# Altium PCB receiver.PcbDoc
Units mil, origin at the board's own origin, x right, y up, seen from the top; angles counter-clockwise.
Board outline 1968.5 x 3897.64 mil, 2 copper layers (Top Layer, Bottom Layer); 43 components, 17 nets, 113 pads, 22 vias.
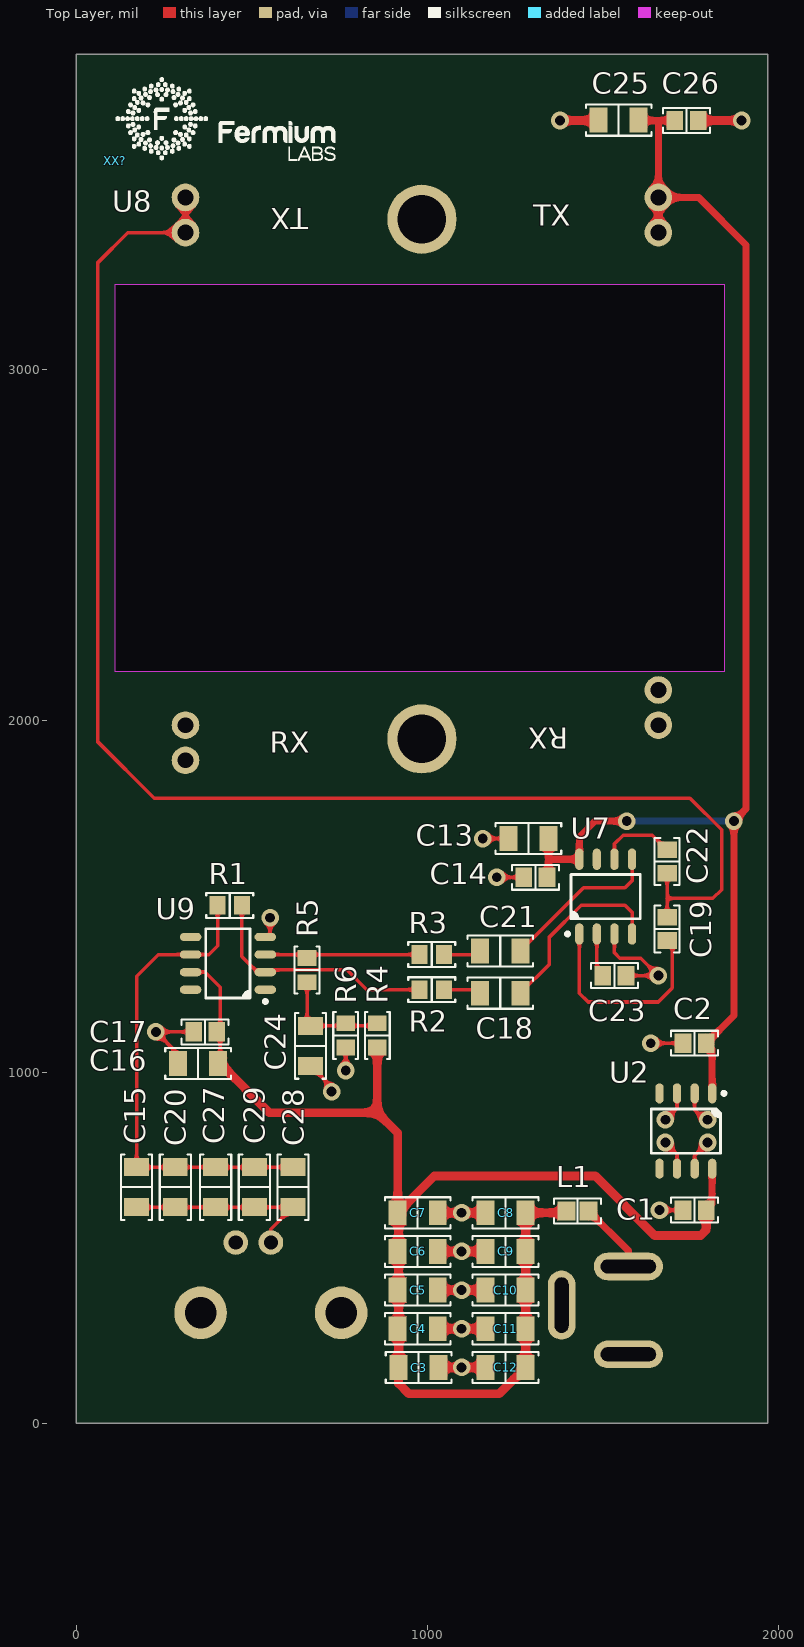
[diagram p0: Top Layer view]
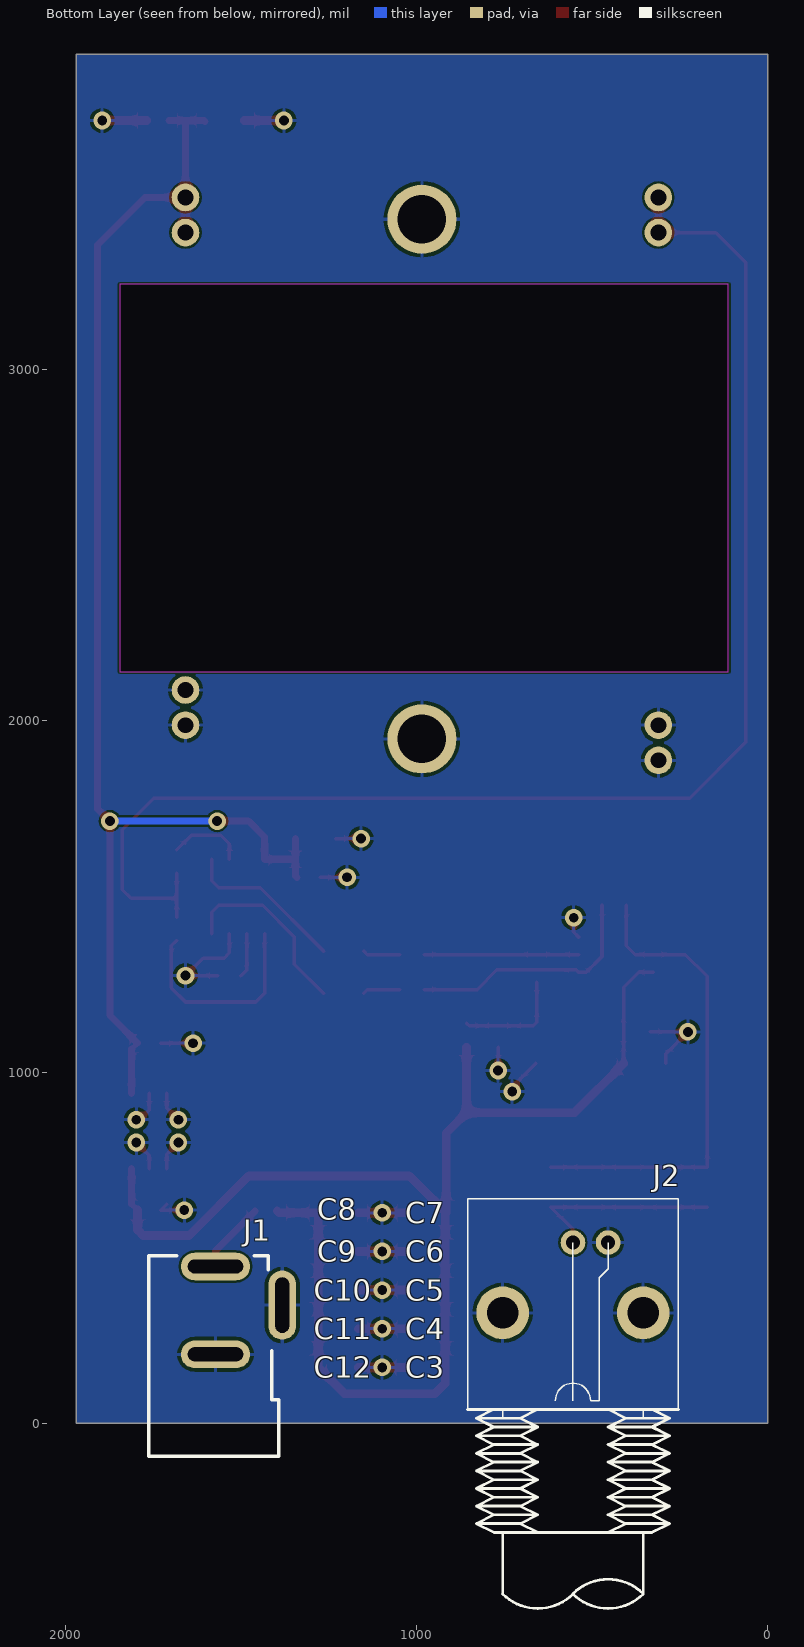
[diagram p1: Bottom Layer view, seen from below]
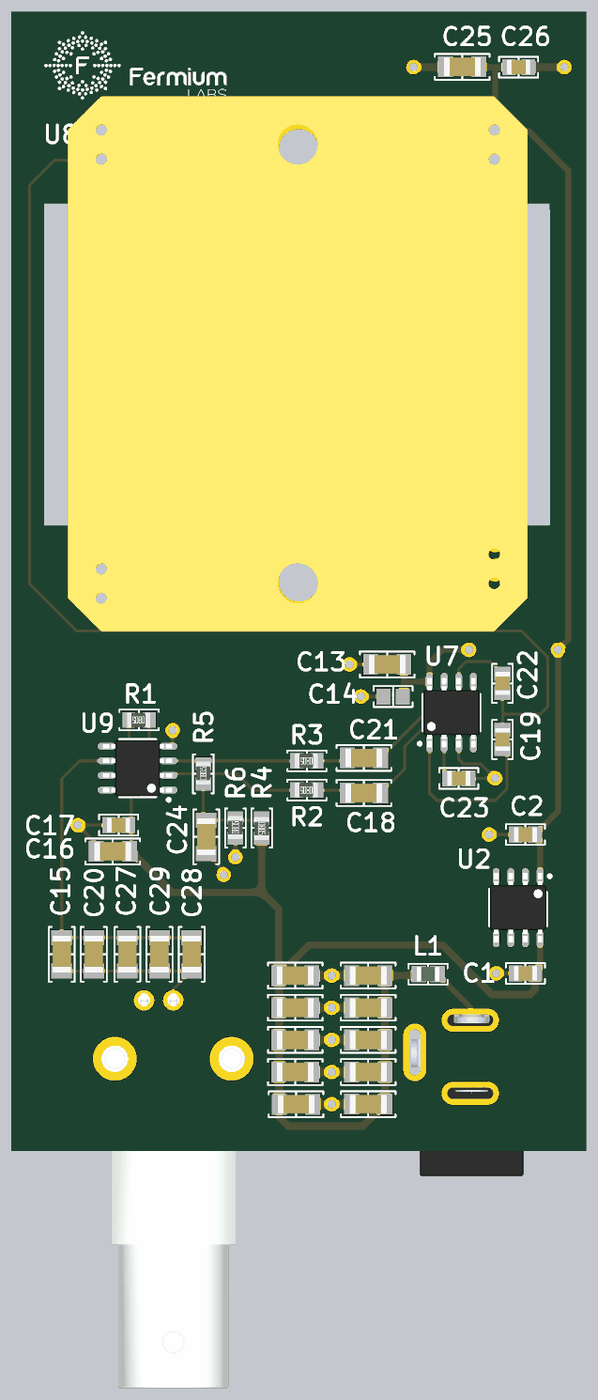
[diagram p2: 3D render of the assembled board from above, using the file's embedded part models]

## Layer stack, top to bottom
Top Solder: solder mask 0.4, Solder Resist, Dk 3.5
Top Layer: signal copper 1.4
Dielectric 1: dielectric 12.6, FR-4, Dk 4.8
Bottom Layer: signal copper 1.4
Bottom Solder: solder mask 0.4, Solder Resist, Dk 3.5

## Board outline
0,0 1968.5,0 1968.5,3897.64 0,3897.64

## Design rules (kind name [scope] priority, off if disabled: settings)
Clearance [All] p1: gap=6 ignorepadtopadclearanceinfootprint=FALSE
FanoutControl Fanout_LCC [All] p1 off: bgadir=Out bgaviamode=Centered fanoutstyle=Auto fanoutdirection=Alternating viagrid=1 // Protel DXP Scope 1 Expression Was: IsLCC   Fanout_LCC (Default Rule)
FanoutControl Fanout_BGA [All] p2 off: bgadir=Out bgaviamode=Centered fanoutstyle=Auto fanoutdirection=Alternating viagrid=1 // Protel DXP Scope 1 Expression Was: IsBGA   Fanout_BGA (Default Rule)
FanoutControl Fanout_SOIC [All] p3 off: bgadir=Out bgaviamode=Centered fanoutstyle=Auto fanoutdirection=Alternating viagrid=1 // Protel DXP Scope 1 Expression Was: IsSOIC   Fanout_SOIC (Default Rule)
FanoutControl Fanout_Default [All] p4: bgadir=Out bgaviamode=Centered fanoutstyle=Auto fanoutdirection=Alternating viagrid=1 // Fanout_Default (Default Rule)
FanoutControl Fanout_Small [All] p5 off: bgadir=Out bgaviamode=Centered fanoutstyle=Auto fanoutdirection=Alternating viagrid=1 // Protel DXP Scope 1 Expression Was: (CompPinCount < 5)   Fanout_Small (Default Rule)
HoleSize [All] p1: absolutevalues=TRUE maxlimit=99999 minlimit=11.81 maxpercent=80.000 minpercent=20.000
MinimumSolderMaskSliver [All] p1 off: minsoldermaskwidth=7.87
PolygonConnect [All] p1: connectstyle=Relief reliefconductorwidth=10 reliefentries=4 polygonreliefangle="90 Angle" airgapwidth=10
RoutingVias [All] p1: holewidth=28 width=50 viastyle="Through Hole" minholewidth=28 minwidth=50 maxholewidth=28 maxwidth=50
SilkToSilkClearance [All] p1: silktosilkclearance=7.87
SilkToSolderMaskClearance [All] p1 off: minsilkscreentomaskgap=10 clearancetoexposedcopper=TRUE // Protel DXP Scope 1 Expression Was: IsPad
SolderMaskExpansion [All] p1: expansion=2
Width [All] p1: maxlimit=200 minlimit=6 preferedwidth=10
21 further rules are at their usual default settings.

## Components (designator, comment, footprint, x,y, rotation, side; value= is the part's Value field where it differs from the comment)
C1 "" "CAP 0805/2012" 1760.51,607.32 r180 top
C2 "" "CAP 0805/2012" 1760.51,1082.32 r180 top
C3 "" "CAP 1206/3216" 974.88,159.09 r0 top
C4 "" "CAP 1206/3216" 972.24,269.65 r0 top
C5 "" "CAP 1206/3216" 972.24,379.65 r0 top
C6 "" "CAP 1206/3216" 972.24,489.65 r0 top
C7 "" "CAP 1206/3216" 972.24,599.65 r0 top
C8 "" "CAP 1206/3216" 1222.24,599.65 r180 top
C9 "" "CAP 1206/3216" 1222.24,489.65 r180 top
C10 "" "CAP 1206/3216" 1222.24,379.65 r180 top
C11 "" "CAP 1206/3216" 1222.24,269.65 r180 top
C12 "" "CAP 1206/3216" 1222.24,159.65 r180 top
C13 "" "CAP 1206/3216" 1287.24,1664.65 r180 top
C14 "" "CAP 0805/2012" 1307.24,1554.65 r180 top
C15 "" "CAP 1206/3216" 172.24,672.56 r270 top
C16 "" "CAP 1206/3216" 347.24,1024.65 r180 top
C17 "" "CAP 0805/2012" 367.24,1114.65 r180 top
C18 "" "CAP 1206/3216" 1207.24,1224.65 r180 top
C19 "" "CAP 0805/2012" 1682.24,1407.65 r270 top value=1nF
C20 "" "CAP 1206/3216" 282.24,672.56 r270 top
C21 "" "CAP 1206/3216" 1207.24,1344.65 r180 top
C22 "" "CAP 0805/2012" 1682.24,1599.65 r90 top value=1nF
C23 "" "CAP 0805/2012" 1532.24,1274.65 r0 top
C24 "" "CAP 1206/3216" 667.24,1074.65 r270 top
C25 "" "CAP 1206/3216" 1544.24,3709.65 r180 top
C26 "" "CAP 0805/2012" 1737.24,3708.65 r0 top
C27 "" "CAP 1206/3216" 397.24,672.56 r270 top
C28 "" "CAP 1206/3216" 617.24,672.56 r270 top
C29 "" "CAP 1206/3216" 507.24,672.56 r270 top
J1 "" dc-jack 1571.8,446.85 r270 bottom
J2 "" BNC-RA 754.33,314.96 r0 bottom
L1 "Inductor Iron" "FER 0805/2012" 1427.24,604.65 r180 top
R1 "Res1" "RES 0805/2012" 437.24,1474.65 r180 top value=220K
R2 "Res1" "RES 0805/2012" 1012.24,1234.65 r180 top value=10K
R3 "Res1" "RES 0805/2012" 1012.24,1334.65 r180 top value=10K
R4 "Res1" "RES 0805/2012" 857.24,1104.65 r270 top value=1K
R5 "Res1" "RES 0805/2012" 657.24,1290.2 r90 top value=220K
R6 "Res1" "RES 0805/2012" 767.24,1104.65 r90 top value=1K
U2 "L78L05ACD" "ST SOIC-8N" 1735.51,832.32 r270 top
U7 "SA612A" "TI SOIC-8 D" 1507.24,1499.65 r90 top
U8 "HB100" HB100-buried 311.24,3489.65 r270 top
U9 "" "TI SOIC-8 D" 432.24,1309.65 r180 top
XX? "fermiumlabs-logo" frm-med 111.81,3594.65 r0 top

## Footprints (in the part's own frame and the unit in brackets; to place one, negate y for a bottom-side part, rotate by r counter-clockwise, add the part's x,y. Pads: shape width x height; smd on the part's side, far side on the other; paste and mask are expansions set on the pad)
BNC-RA [mil]
  round 70 hole 40: 1(-200,-200) 2(-300,-200)
  round 150 hole 90: A(0,0) B(-400,0)
  silkscreen extent -500,-325 100,842, body extent -490,-280 91,1127, height 619
"CAP 0805/2012" [mm] "Chip Capacitor, 2-Leads, Body 2.00x1.20mm, IPC Medium Density"
  rect 1.2x1.4 smd: 1(-0.838,0) 2(0.838,0)
  silkscreen extent -1.7,-0.9 1.7,0.9, body extent -1,-0.64 1,0.64, height 1.26
"CAP 1206/3216" [mm] "Chip Capacitor, 2-Leads, Body 3.25x1.60mm, IPC Medium Density"
  rect 1.3x1.8 smd: 1(-1.45,0) 2(1.45,0)
  silkscreen extent -2.37,-1.12 2.37,1.12, body extent -1.6,-0.81 1.6,0.81, height 1.62
dc-jack [mm]
  oval 2x5 hole 1 slot 4 at 90 deg: 1(0,0) 3(6.35,0)
  oval 5x2 hole 1 slot 4 at 0 deg: 2(2.794,4.826)
  silkscreen extent -0.76,-4.83 13.72,4.57, body extent -0.76,-4.62 13.54,5.13, height 11.3
"FER 0805/2012" [mm] "Chip Ferrite, 2-Leads, Body 2.00x1.20mm, IPC Medium Density"
  rect 1.3x1.4 smd: 1(-0.8,0) 2(0.8,0)
  silkscreen extent -1.7,-0.9 1.7,0.9, body extent -1,-0.64 1,0.64, height 1.26
frm-med [mil]
  silkscreen extent 1,1 626,237
HB100-buried [mm]
  round 2 hole 1.143: 1(0,34.188) 1(2.54,34.188) 2(0,0) 2(2.54,0) 3(38.151,0) 3(40.691,0) 4(35.611,34.188) 4(38.151,34.188)
  round 5 hole 3.5: 5(1.575,17.094) 5(39.141,17.094)
  Keep-Out Layer board cut-out: 34.286,38.934 34.286,-5.066 6.286,-5.066 6.286,38.934
  body extent -3.02,-3 43.48,37, height 3
"RES 0805/2012" [mm] "Chip Resistor, 2-Leads, Body 2.00x1.25mm, IPC Medium Density"
  rect 1.15x1.35 smd: 1(-0.875,0) 2(0.875,0)
  silkscreen extent -1.7,-0.9 1.7,0.9, body extent -0.95,-0.62 1.05,0.63, height 0.6
"ST SOIC-8N" [mm] "SOIC, 8-Leads, Body 4.90x3.90mm, Pitch 1.27mm, IPC Medium Density"
  oval 1.45x0.6 smd: 1(-2.725,1.905) 2(-2.725,0.635) 3(-2.725,-0.635) 4(-2.725,-1.905) 5(2.725,-1.905) 6(2.725,-0.635) 7(2.725,0.635) 8(2.725,1.905)
  silkscreen extent -2.85,-2.5 1.6,2.88, body extent -3.01,-2.45 3.01,2.45, height 1.5
"TI SOIC-8 D" [mm] "SOP, 8-Leads, Body 4.90x3.90mm, Pitch 1.27mm, IPC Medium Density"
  oval 1.55x0.6 smd: 1(-2.7,1.905) 2(-2.7,0.635) 3(-2.7,-0.635) 4(-2.7,-1.905) 5(2.7,-1.905) 6(2.7,-0.635) 7(2.7,0.635) 8(2.7,1.905)
  silkscreen extent -2.82,-2.5 1.6,2.88, body extent -3.01,-2.45 3.01,2.45, height 1.5

## Part data
C1 C2 C14 C17 C23 C26: library part Cap2, "Capacitor", Capacitance=100nF, Capacitor kind=MLCC, Capacitor type=ceramic, Case - inch=0805, Case - mm=2012, Dielectric=X7R, Manufacturer=YAGEO, Manufacturer Part Number=CC0805JRX7R9BB104, Operating voltage=50V, Supplier Part Number 1=CC0805JRX7R9104, Tolerance=±5%, Category="0805 MLCC SMD Capacitors", ComponentLink1Description=http://static.tme.eu/products_pics/d/b/b/dbbd93eaf25225110ca26eb66da77328/58538.jpg, ComponentLink1URL=http://static.tme.eu/products_pics/d/b/b/dbbd93eaf25225110ca26eb66da77328/58538.jpg, MinAmount=100, Mounting=SMD, Multiples=100, Pads="2 SMD", Price Type=NET, Pricing 1="100=0.00613, 300=0.00464, 1000=0.00342, 4000=0.00284, 20000=0.00273 (EUR)", Stock 1=89911, SuppliedAmount=0, Supplier 1=TME, Unit=pcs, Weight=0.042
C3 C4 C5 C6 C7 C8 C9 C10 C11 C12 C13 C15 C16 C18 C20 C21 C24 C25 C27 C28 C29: library part Cap2, "Capacitor", Capacitance=10µF, Capacitor kind=MLCC, Capacitor type=ceramic, Case - inch=1206, Case - mm=3216, Dielectric=X5R, Manufacturer=SAMSUNG, Manufacturer Part Number=CL31A106KAHNNNE, Operating temperature=-55...85°C, Operating voltage=25V, Tolerance=±10%, Category="1206 MLCC SMD Capacitors", ComponentLink1Description=http://static.tme.eu/products_pics/b/e/9/be9e0dd298dcf4979ea1dd3d226e0bfa/58780.jpg, ComponentLink1URL=http://static.tme.eu/products_pics/b/e/9/be9e0dd298dcf4979ea1dd3d226e0bfa/58780.jpg, MinAmount=100, Mounting=SMD, Multiples=100, PackageDescription=1206, PackageReference=CAPR5-4X5, Pads="2 SMD", Price Type=NET, Pricing 1="100=0.0248, 300=0.0203, 1000=0.0167, 2000=0.0131, 10000=0.0127 (EUR)", Published=23-Sep-2002, Publisher="Altium Limited", Stock 1=279700, SuppliedAmount=0, Supplier 1=TME, Supplier Part Number 1=CL31A106KAHNNNE, Unit=pcs, Weight=0.061
C19 C22: library part Cap, "Capacitor", Capacitance=1nF, Case/Package=0805, Case Code (Metric)=2012, Dielectric=X7R, Manufacturer=Samsung, Manufacturer Part Number=CL21B102KCANNNC, Max Operating Temperature=125°C, Min Operating Temperature=-55°C, Package Quantity=1, Tolerance=10%, Voltage=100V, Case Code (Imperial)=0805, ComponentLink1Description=https://datasheet.ciiva.com/26878/getdatasheetpartid-643098-26878049.pdf, ComponentLink1URL=https://datasheet.ciiva.com/26878/getdatasheetpartid-643098-26878049.pdf, ComponentLink2Description=https://datasheet.ciiva.com/29199/456063-da-01-en-vs-kondensator-0805-29199067.pdf, ComponentLink2URL=https://datasheet.ciiva.com/29199/456063-da-01-en-vs-kondensator-0805-29199067.pdf, ComponentLink3Description=https://datasheet.ciiva.com/26310/mlcc-catalogdownload2013-eng-26310183.pdf, ComponentLink3URL=https://datasheet.ciiva.com/26310/mlcc-catalogdownload2013-eng-26310183.pdf, Depth=1.25mm, Height=0.65mm, Lead Free="Lead Free", Length=2mm, Material=Ceramic, Mount="Surface Mount", Packaging="Tape and Reel", Pricing 1="100=0.0073, 300=0.0056, 1000=0.0044, 4000=0.0032, 20000=0.0031 (USD)", Radiation Hardening=No, Stock 1=40500, Supplier 1=TME, Supplier Part Number 1=CL21B102KCANNNC, Thickness=0.03inch, Voltage Rating=100V, Voltage Rating (DC)=100V, Width=0.049inch
J1: library part jackdc, Manufacturer=CLIFF, Manufacturer Part Number="DC-10A FC68148", Package type="in bulk", Rated current=5A, Rated voltage="12V DC", Supplier Part Number 1=FC68148, Category="DC power connectors", ComponentLink1Description=http://static.tme.eu/products_pics/f/8/e/f8eb2e1bea4ffe6692f5958f8ef9edd4/323250.jpg, ComponentLink1URL=http://static.tme.eu/products_pics/f/8/e/f8eb2e1bea4ffe6692f5958f8ef9edd4/323250.jpg, Connector=socket, Connector type="DC supply", Connector variant="with on/off switch", Contact size=5,5/2,1mm, Electrical mounting=soldering, MinAmount=1, Multiples=1, Pads="3 THT", Plug inside diameter=2.1mm, Plug outside diameter=5.5mm, Price Type=NET, Pricing 1="1=0.4194, 20=0.3065, 100=0.2581, 500=0.2258 (USD)", Spatial orientation="angled 90°", Stock 1=20287, SuppliedAmount=0, Supplier 1=TME, Unit=pcs, Weight=1.733
J2: library part BNC-PCB-RA, "connector bnc", Manufacturer="TE CONNECTIVITY", Manufacturer Part Number=1-1337543-0, Category="BNC connectors", ComponentLink1Description=http://static.tme.eu/products_pics/6/3/2/63240353f8a8790dbe8f7bd93b014c1a/378606.jpg, ComponentLink1URL=http://static.tme.eu/products_pics/6/3/2/63240353f8a8790dbe8f7bd93b014c1a/378606.jpg, Connector=socket, Connector type=BNC, Connector variant=insulated, Contact plating="gold plated", Electrical mounting=THT, Insulator material=polyester, Mechanical mounting="on PCBs", MinAmount=1, Multiples=1, Pads="4 THT", Price Type=NET, Pricing 1="1=1.22, 25=1.1, 100=0.98, 1000=0.86 (EUR)", Spatial orientation="angled 90°", Stock 1=44, SuppliedAmount=0, Supplier 1=TME, Supplier Part Number 1=1-1337543-0, Unit=pcs, Wave impedance=50O, Weight=13.22
L1: "Magnetic-Core Inductor", Case/Package=0805, Case Code (Metric)=2012, Current Rating=500mA, DC Current=200mA, DC Resistance (DCR)=280mR, Frequency=100MHz, Manufacturer=Murata, Manufacturer Part Number=BLM21AG102SN1D, Max Current Rating=600mA, Max Operating Temperature=125°C, Min Operating Temperature=-55°C, Package Quantity=1, Tolerance=25%, Case Code (Imperial)=0805, ComponentLink1Description=https://datasheet.ciiva.com/19454/1845136-19454717.pdf, ComponentLink1URL=https://datasheet.ciiva.com/19454/1845136-19454717.pdf, ComponentLink2Description=https://datasheet.ciiva.com/18093/getdatasheetpartid-139643-18093010.pdf, ComponentLink2URL=https://datasheet.ciiva.com/18093/getdatasheetpartid-139643-18093010.pdf, ComponentLink3Description=https://datasheet.ciiva.com/29347/442432-da-01-en-chip-drossel-0805-1000r-200ma-2-0x1-25mm-29347996.pdf, ComponentLink3URL=https://datasheet.ciiva.com/29347/442432-da-01-en-chip-drossel-0805-1000r-200ma-2-0x1-25mm-29347996.pdf, ComponentLink4Description=https://datasheet.ciiva.com/41449/001172322-da-01-en-drossel-0805-1000r-2-0x1-25mm-4000st-41449636.pdf, ComponentLink4URL=https://datasheet.ciiva.com/41449/001172322-da-01-en-drossel-0805-1000r-2-0x1-25mm-4000st-41449636.pdf, ComponentLink5Description=https://datasheet.ciiva.com/6212/l0110s0100blm21a-6212318.pdf, ComponentLink5URL=https://datasheet.ciiva.com/6212/l0110s0100blm21a-6212318.pdf, ComponentLink6Description=https://datasheet.ciiva.com/16286/l0110s0100blm21a-16286461.pdf, ComponentLink6URL=https://datasheet.ciiva.com/16286/l0110s0100blm21a-16286461.pdf, ComponentLink7Description=https://datasheet.ciiva.com/8021/l0110s0100blm21a-8021550.pdf, ComponentLink7URL=https://datasheet.ciiva.com/8021/l0110s0100blm21a-8021550.pdf, ComponentLink8Description=https://datasheet.ciiva.com/8021/l0110s0100blm21a-8021548.pdf, ComponentLink8URL=https://datasheet.ciiva.com/8021/l0110s0100blm21a-8021548.pdf, ComponentLink9Description=https://datasheet.ciiva.com/3081/l0110s0100blm21a-3081640.pdf, ComponentLink9URL=https://datasheet.ciiva.com/3081/l0110s0100blm21a-3081640.pdf, ComponentLink10Description=https://datasheet.ciiva.com/25903/l0110s0100blm21a-25903493.pdf, ComponentLink10URL=https://datasheet.ciiva.com/25903/l0110s0100blm21a-25903493.pdf, ComponentLink11Description=https://datasheet.ciiva.com/3082/l0110s0100blm21a-3082728.pdf, ComponentLink11URL=https://datasheet.ciiva.com/3082/l0110s0100blm21a-3082728.pdf, ComponentLink12Description=https://datasheet.ciiva.com/6212/l0110s0100blm21a-6212347.pdf, ComponentLink12URL=https://datasheet.ciiva.com/6212/l0110s0100blm21a-6212347.pdf, ComponentLink13Description=https://datasheet.ciiva.com/6212/l0110s0100blm21a-6212345.pdf, ComponentLink13URL=https://datasheet.ciiva.com/6212/l0110s0100blm21a-6212345.pdf, Core Material=Ferrite, Depth=1.25mm, Height=0.85mm, Impedance=1KR, Lead Free="Lead Free", Length=2mm, Material=Steel,Ferrite, Max DC Current=200mA, Military Standard=Not, Number of Circuits=1, Number of Lines=1, Number of Pins=2, Packaging="Tape and Reel", Pricing 1="25=0.068, 100=0.0551, 1000=0.0451, 4000=0.0397 (USD)", Radiation Hardening=No, REACH SVHC="No SVHC", Shielding=Unshielded, Stock 1=53975, Supplier 1=TME, Supplier Part Number 1=BLM21AG102SN1D, Termination=SMD/SMT, Test Frequency=100MHz, Weight=0.000194oz, Width=1.25mm
R1 R5: "Resistor", Manufacturer="Royal Electronic Factory", Manufacturer Part Number=0805S8J0224T5E, Supplier Part Number 1=SMD0805-220K, Pricing 1="100=0.0065, 1000=0.0025, 5000=0.0009, 15000=0.0008, 50000=0.0008 (USD)", Stock 1=102100, Supplier 1=TME
R2 R3: "Resistor", Manufacturer="Royal Electronic Factory", Manufacturer Part Number=0805S8J0103T5E, Supplier Part Number 1=SMD0805-10K, Pricing 1="100=0.0065, 1000=0.0023, 5000=0.0008, 15000=0.0008, 50000=0.0008 (USD)", Stock 1=1600500, Supplier 1=TME
R4 R6: "Resistor", Manufacturer="Royal Electronic Factory", Manufacturer Part Number=0805S8J0102T5E, Supplier Part Number 1=SMD0805-1K, Pricing 1="100=0.0062, 1000=0.0024, 5000=0.0008, 15000=0.0008, 50000=0.0008 (USD)", Stock 1=2713700, Supplier 1=TME
U7: Supplier Part Number 1=SA612AD, Supplier 1=TME, Supplier 2=Mouser, Supplier Part Number 2=771-SA612AD01112
U8: Manufacturer="China unspecified", Manufacturer Part Number=HB100, Supplier 1=Alibaba, Supplier Part Number 1=HB100
U9: library part LF358, Supplier Part Number 1=LF356M/NOPB, Supplier 1=TME, Supplier 2=Mouser, Supplier 3=Farnell, Supplier Part Number 2=926-LF356M, Supplier Part Number 3=9486992
U2: Supplier 1=TME, Supplier Part Number 1=L78L05ACD

## Via types
v1: diameter 50, hole 28, Top Layer to Bottom Layer, 22 vias

## Nets (pads, with @x,y where several pads share a name; then routed paths per layer and width w, separated by ;. In a path a pad name is that pad's centre, name@x,y a point inside that pad or via, vN(x,y) a via of type N, cw(c..) or ccw(c..) an arc to the next point about the centre after c; other vN are vias at no path point)
5V: C2.1 C13.1 C14.1 C25.1 C26.1 U2.1 U7.8 U8.1 | length 3913.9
  Top Layer w10: C2.1 C2.1@1810.51,1065.32
  Top Layer w20: C14.1 1344.33,1558.73 1344.33,1604.65 ; C13.1 1344.33,1604.65 ; v1(1567.24,1714.65) 1477.24,1714.65 1432.24,1669.65 U7.8 1345.63,1605.94 1344.33,1604.65 ; C25.1@1601.25,3705.57 1604.33,3708.65 C26.1 ; U8.1@1657.24,3389.65 U8.1@1657.24,3489.65 ; 1657.24,3701.65 U8.1@1657.24,3489.65 ; C2.1 1872.24,1161.06 v1(1872.24,1714.65) 1907.24,1749.65 1907.24,3354.65 1772.24,3489.65 U8.1@1657.24,3489.65 ; U2.1 C2.1@1810.51,1065.32
  Bottom Layer w20: v1(1567.24,1714.65) v1(1872.24,1714.65)
12V: C1.1 C3.1 C4.1 C5.1 C6.1 C7.1 C8.1 C9.1 C10.1 C11.1 C12.1 C16.1 C17.1 L1.2 R4.2 U2.8 U9.7 | length 3948.8
  Top Layer w10: U9.7 367.24,1284.65 410.16,1241.73 C16.1@410.16,1024.65 ; C1.1 C1.1@1810.51,624.32
  Top Layer w20: C1.1@1810.51,624.32 U2.8
  Top Layer w25: C16.1@410.16,1024.65 550.16,884.65 857.24,884.65 ; R4.2 857.24,884.65 ; L1.2 1390.75,599.65 C8.1 C9.1 C10.1 C11.1 C12.1 1204.33,84.65 947.24,84.65 917.8,114.09 C3.1 917.8,379.65 917.8,597.01 C7.1 ; C1.1 1793.51,550.91 1777.24,534.65 1647.24,534.65 1477.24,704.65 1020.16,704.65 C7.1 ; 857.24,884.65 915.16,826.73 C7.1
GND: C1.2 C2.2 C3.2 C4.2 C5.2 C6.2 C7.2 C8.2 C9.2 C10.2 C11.2 C12.2 C13.2 C14.2 C16.2 C17.2 C23.2 C24.2 C25.2 C26.2 J1.2 J1.3 J2.2 J2.A J2.B R6.1 U2.2 U2.3 U2.6 U2.7 U7.3 U8.3 U8.4 U8.5 U9.4 | length 2346.4
  Top Layer w10: C16.2 290.16,1051.73 v1(227.24,1114.65) C17.2 ; U9.4 552.24,1398.35 v1(552.24,1439.65) ; C24.2@660.16,1024.65 C24.2 727.24,957.56 v1(727.24,944.65) ; v1(767.24,1004.65) R6.1 ; v1(1157.24,1664.65) C13.2 ; v1(1197.24,1554.65) C14.2 ; U7.3 1532.24,1339.65 1547.24,1324.65 1607.24,1324.65 v1(1657.24,1274.65) ; C23.2 v1@1632.24,1274.65 ; v1(1635.51,1082.32) C2.2 ; v1(1660.51,607.32) C1.2 C1.2@1710.51,624.32 ; v1(1677.24,799.65) 1710.51,766.38 U2.6 ; v1(1677.24,864.65) 1710.51,897.91 U2.3 ; U2.7 1760.51,762.91 v1(1797.24,799.65) ; U2.2 1760.51,891.38 1787.24,864.65 v1(1797.24,864.65)
  Top Layer w25: J2.A J2.A@754.65,314.65 ; C3.2@1029.33,161.73 C3.2 1032.52,159.65 v1(1097.24,159.65) C12.2 ; C4.2 v1(1097.24,269.65) C11.2 ; C5.2 v1(1097.24,379.65) C10.2 ; C6.2 v1(1097.24,489.65) C9.2 ; C7.2 v1(1097.24,599.65) C8.2 ; v1(1377.24,3708.65) C25.2@1490.16,3708.65 ; C26.2@1767.24,3708.65 C26.2 v1(1894.24,3708.65)
NetC15_1: C15.1 C20.1 C27.1 C28.1 C29.1 R1.2 U9.6 | length 1369.3
  Top Layer w10: R1.2 402.8,1360.2 377.24,1334.65 U9.6 234.24,1334.65 172.24,1272.65 C15.1 C20.1 C27.1 C29.1 C28.1
NetC15_2: C15.2 C20.2 C27.2 C28.2 C29.2 J2.1 | length 571.6
  Top Layer w10: C15.2 C20.2 C27.2 C29.2 C28.2 554.33,552.56 J2.1
NetC18_1: C18.1 U7.4 | length 536.2
  Top Layer w10: C18.1 1347.24,1307.56 1347.24,1384.65 1437.24,1474.65 1562.24,1474.65 1582.24,1454.65 U7.4
NetC18_2: C18.2 R2.1 | length 107.6
  Top Layer w10: R2.1 1140.16,1234.65 C18.2
NetC19_1: C19.1 C22.1 U8.2 | length 4089.1
  Top Layer w10: U8.2@311.24,3489.65 311.24,3389.65 147.24,3389.65 62.24,3304.65 62.24,1939.65 222.24,1779.65 1747.24,1779.65 1837.24,1689.65 1837.24,1519.65 1812.24,1494.65 1682.24,1494.65 ; C19.1 1682.24,1494.65 ; C22.1 1682.24,1494.65
NetC19_2: C19.2 U7.1 | length 601.8
  Top Layer w10: U7.1 1432.24,1224.65 1457.24,1199.65 1657.24,1199.65 1697.24,1239.65 1697.24,1359.65 C19.2
NetC21_1: C21.1 U7.5 | length 462.1
  Top Layer w10: C21.1 1444.33,1524.65 1562.24,1524.65 1582.24,1544.65 U7.5
NetC21_2: C21.2 R3.1 | length 107.6
  Top Layer w10: R3.1 1140.16,1334.65 C21.2
NetC22_2: C22.2 U7.6 | length 221.5
  Top Layer w10: U7.6 1532.24,1649.65 1557.24,1674.65 1640.24,1674.65 C22.2
NetC23_1: C23.1 U7.2 | length 125.7
  Top Layer w10: U7.2 1482.24,1291.65 C23.1
NetC24_1: C24.1 R4.1 R5.1 R6.2 | length 321.2
  Top Layer w10: R5.1 657.24,1141.73 C24.1 849.88,1131.73 R4.1
NetJ1_1: J1.1 L1.1 | length 204.6
  Top Layer w20: L1.1 1571.8,491.58 J1.1
NetR1_1: R1.1 R2.2 U9.2 | length 695.9
  Top Layer w10: R1.1 471.69,1329.29 516.33,1284.65 U9.2 544.91,1291.01 770.88,1291.01 827.24,1234.65 R2.2
NetR3_2: R3.2 R5.2 U9.3 | length 439.3
  Top Layer w10: U9.3 R3.2
pads on no net: U2.4 U2.5 U7.7 U9.1 U9.5 U9.8

## Polygon pours and split planes (outlines as drawn)
GND on Bottom Layer "Bottom Layer-No Net" (solid, pour order 0): 0,0 1968.5,0 1968.5,3897.64 0,3897.64

## Silkscreen, mask and mechanical layers (free items; w line width, h text height)
Mechanical 1:
  lines w10: 0,0 1968.5,0 1968.5,3897.64 0,3897.64 0,0 ; 114.4,2144.3 1846.69,2144.3 1846.69,3246.66 114.4,3246.66 114.4,2144.3

## Text inside footprints (layer, text, board x,y; h text height)
U8: Top Overlay "RX" at 1401.24,1979.65 h60 r180; Top Overlay "TX" at 661.24,3459.65 h60 r180; Top Overlay "TX" at 1301.24,3409.65 h60; Top Overlay "RX" at 551.24,1909.65 h60; Mechanical 1 "## CUT CUT CUT ## / ## CUT CUT CUT ## / ## CUT CUT CUT ## / ## CUT CUT CUT ## / ## CUT CUT CUT ## / ## CUT CUT CUT ## / ## CUT CUT CUT ## / ## CUT CUT CUT ## / ## CUT CUT CUT ## / ## CUT CUT CUT ## / ## CUT CUT CUT ## / ## CUT CUT CUT ## / ## CUT CUT CUT ## / ## CUT CUT CUT ## / ## CUT CUT CUT ## / ## CUT CUT CUT ## / ## CUT CUT CUT ## / ## CUT CUT CUT ##" at 121.24,3199.65 h60 r270